# Altium PCB aucma_tranfer V1.0.PcbDoc
Units mil, origin at the board's own origin, x right, y up, seen from the top; angles counter-clockwise.
Board outline 3661.42 x 5380 mil, 2 copper layers (Top Layer, Bottom Layer); 69 components, 0 nets, 222 pads, 82 vias.
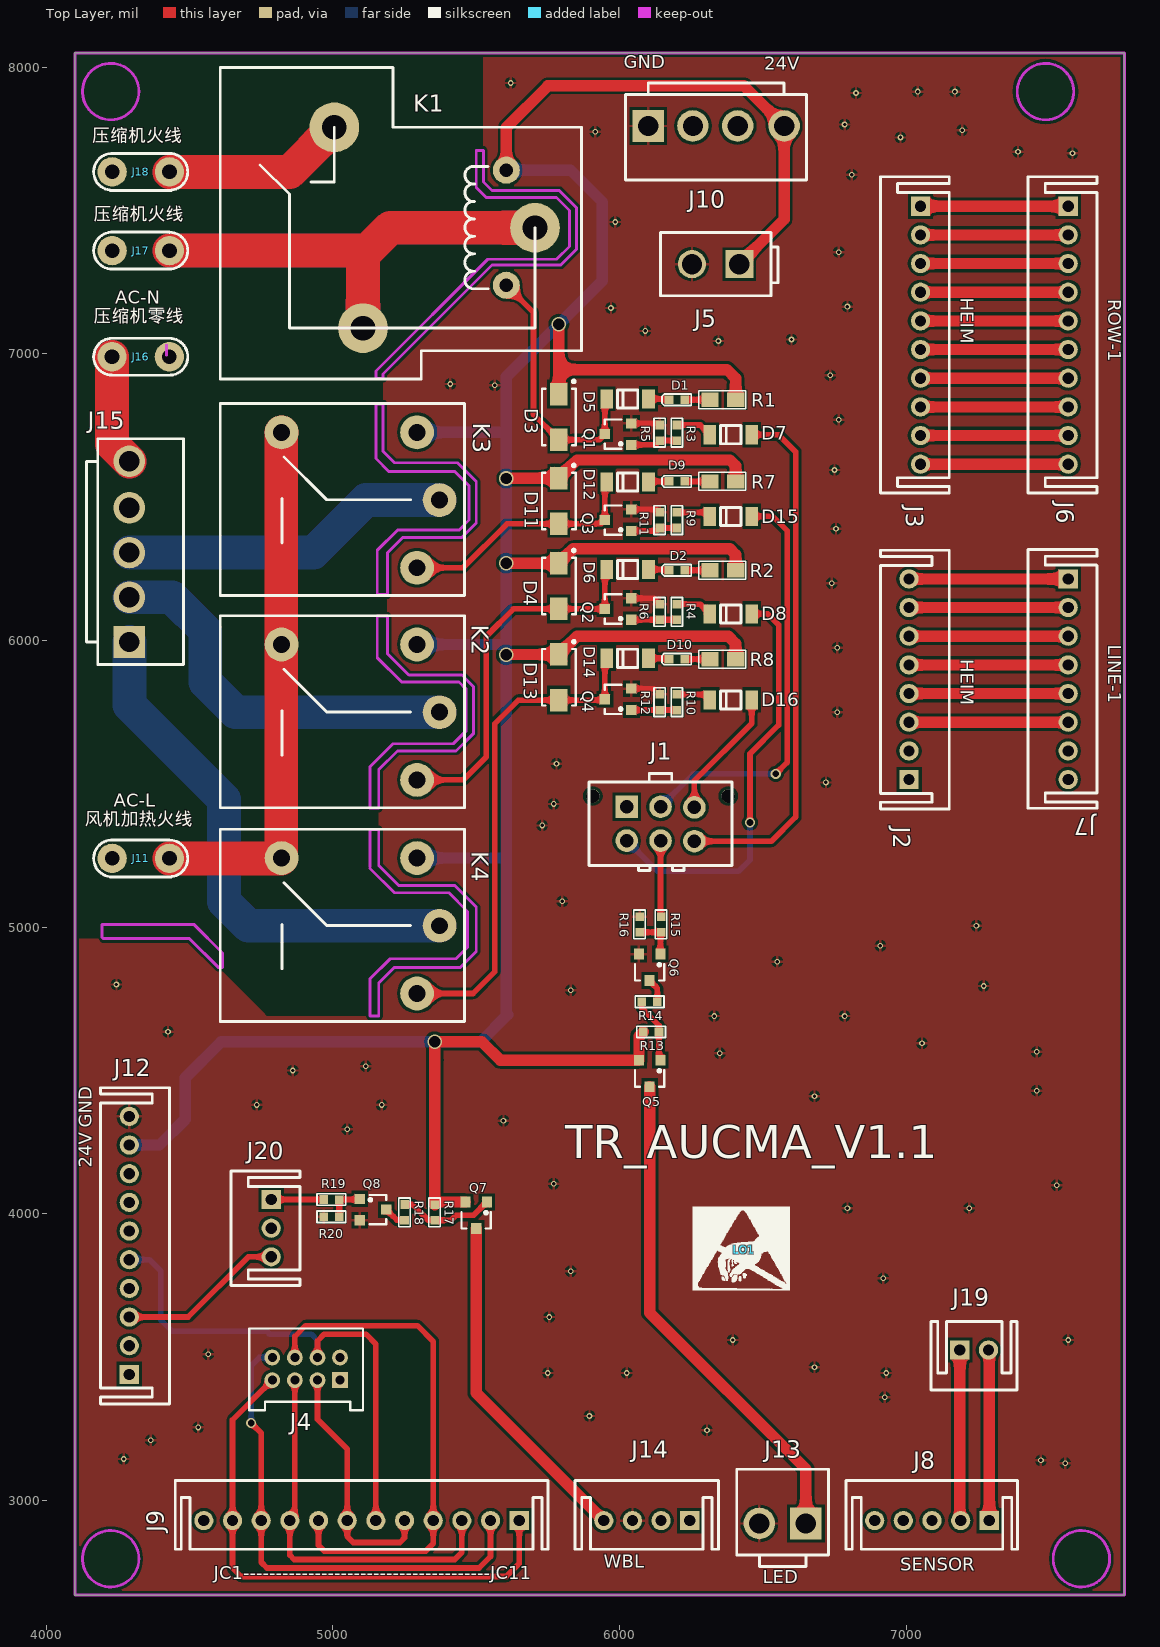
[diagram p0: Top Layer view]
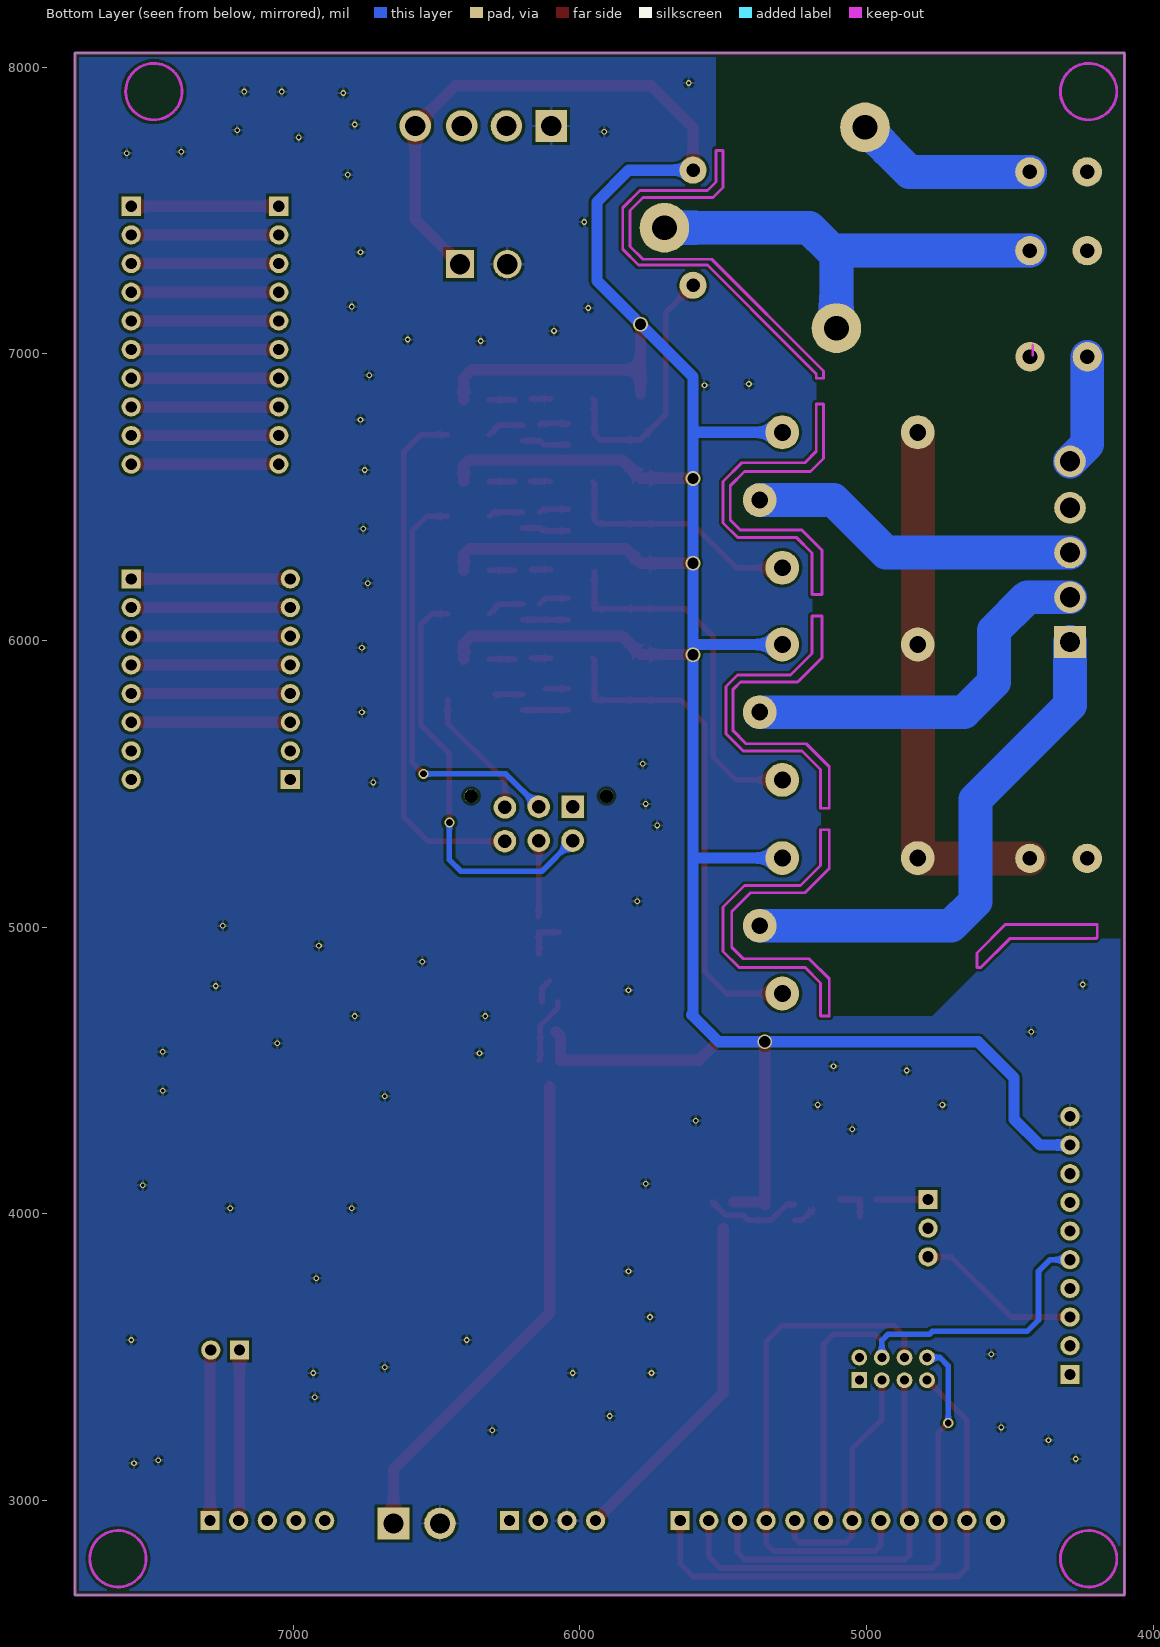
[diagram p1: Bottom Layer view, seen from below]

## Layer stack, top to bottom
Top Solder: solder mask 0.4, Solder Resist, Dk 3.5
Top Layer: signal copper 1.4
Dielectric 1: dielectric 12.6, FR-4, Dk 4.8
Bottom Layer: signal copper 1.4
Bottom Solder: solder mask 0.4, Solder Resist, Dk 3.5

## Board outline
4100,2670 4100,8050 7761.42,8050 7761.42,2670

## Design rules (kind name [scope] priority, off if disabled: settings)
Clearance [All] p1: gap=10
PolygonConnect [All] p1: connectstyle=Relief reliefconductorwidth=10 reliefentries=4 polygonreliefangle="90 Angle" airgapwidth=10
RoutingVias [All] p1: holewidth=28 width=50 viastyle="Through Hole" minholewidth=28 minwidth=50 maxholewidth=28 maxwidth=50
SolderMaskExpansion [All] p1: expansion=4
Width [All] p1: maxlimit=10 minlimit=10 preferedwidth=10
30 further rules are at their usual default settings.

## Components (designator, comment, footprint, x,y, rotation, side; value= is the part's Value field where it differs from the comment)
D1 "蓝色LED" 0603_D 6200,6840 r180 top
D2 "绿色LED" 0603_D 6200,6245 r180 top
D3 "SS34" SMA/DO214AC#1 5788.31,6780 r270 top
D4 "SS34" SMA/DO214AC#1 5788.31,6190 r270 top
D5 "1N4148" LL34_2P 5995,6850 r180 top
D6 "1N4148" LL34_2P 5995,6255 r180 top
D7 "1N4007" LL34_2P 6355,6725 r180 top
D8 "1N4007" LL34_2P 6355,6100 r180 top
D9 "红色LED" 0603_D 6200,6555 r180 top
D10 "黄色LED" 0603_D 6200,5935 r180 top
D11 "SS34" SMA/DO214AC#2 5831.61,6475 r90 top
D12 "1N4148" LL34_2P 5995,6560 r180 top
D13 "SS34" SMA/DO214AC#2 5831.61,5860 r90 top
D14 "1N4148" LL34_2P 5995,5945 r180 top
D15 "1N4007" LL34_2P 6355,6440 r180 top
D16 "1N4007" LL34_2P 6355,5800 r180 top
J1 "DIP-2*3" С5557-2*3A 6025,5420 r0 top
J2 "SIP-8-BLUE" XHB-8A 7010,5515 r90 top
J3 "SIP-10-BLUE" XHB-10A 7050,7515 r270 top
J4 "DIP-2*4" PHB-2*4A 4815,3225 r180 top
J5 "DIP-2*1" 5557-2*1A 6260,7315 r270 top
J6 "SIP-10" XHB-10A 7565,7515 r270 top
J7 "SIP-8" XHB-8A 7565,6215 r270 top
J8 "SIP-5-RED" XHB-5A 7290,2930 r180 top
J9 "SIP-12" XHB-12A 5650,2930 r180 top
J10 "SIP-4" VH3.96-4A 6100,7795 r0 top
J11 "SIP-2" "positioning crimp terminals" 4230,5240 r0 top
J12 "SIP-10-RED" XHB-10A 4290,3440 r90 top
J13 "SIP-2" VH3.96-2A 6650,2920 r180 top
J14 "SIP-4" XHB-4A 6245,2930 r180 top
J15 "SIP-5-RED" VH3.96-5A 4290,6625 r90 top
J16 "SIP-2" "positioning crimp terminals" 4429.6,6990 r180 top
J17 "SIP-2" "positioning crimp terminals" 4230,7360 r0 top
J18 "SIP-2" "positioning crimp terminals" 4230,7635 r0 top
J19 "SIP-2-BLUE" XHB-2A 7195,3525 r0 top
J20 "SIP-3" XHB-3A 4785,4050 r270 top
K1 "Relay-SPST" SLA-24VDC-SL-A 5705,7440 r90 top
K2 "Relay-SPST" HF152FD-1H 5372.36,5750 r180 top
K3 "Relay-SPST" HF152FD-1H 5372.36,6490 r180 top
K4 "Relay-SPST" HF152FD-1H 5372.36,5005 r180 top
LO1 "LOGO" THAND 6435,3875 r0 top
Q1 "BC817-40" SOT-23-3 5995,6720 r90 top
Q2 "BC817-40" SOT-23-3 5995,6110 r90 top
Q3 "BC817-40" SOT-23-3 5995,6420 r90 top
Q4 "BC817-40" SOT-23-3 5995,5795 r90 top
Q5 "AO3401" SOT-23-3 6105,4490 r180 top
Q6 "BC817-40" SOT-23-3 6105,4860 r180 top
Q7 "AO3401" SOT-23-3 5500,3995 r180 top
Q8 "BC817-40" SOT-23-3 5140,4015 r270 top
R1 "4.7KΩ/1%" 0805_R 6315,6840 r0 top
R2 "4.7KΩ/1%" 0805_R 6315,6245 r0 top
R3 "4.7KΩ/1%" 0603_R 6200,6725 r270 top
R4 "4.7KΩ/1%" 0603_R 6200,6100 r270 top
R5 "100KΩ/1%" 0603_R 6140,6725 r270 top
R6 "100KΩ/1%" 0603_R 6140,6100 r270 top
R7 "4.7KΩ/1%" 0805_R 6315,6555 r0 top
R8 "4.7KΩ/1%" 0805_R 6315,5935 r0 top
R9 "4.7KΩ/1%" 0603_R 6200,6420 r270 top
R10 "4.7KΩ/1%" 0603_R 6200,5785 r270 top
R11 "100KΩ/1%" 0603_R 6140,6420 r270 top
R12 "100KΩ/1%" 0603_R 6140,5785 r270 top
R13 "2.2KΩ/1%" 0603_R 6110,4635 r0 top
R14 "4.7KΩ/1%" 0603_R 6105,4740 r180 top
R15 "4.7KΩ/1%" 0603_R 6145,5010 r270 top
R16 "100KΩ/1%" 0603_R 6070,5010 r270 top
R17 "2.2KΩ/1%" 0603_R 5355,4005 r270 top
R18 "4.7KΩ/1%" 0603_R 5250,4005 r90 top
R19 "4.7KΩ/1%" 0603_R 4995,4050 r0 top
R20 "100KΩ/1%" 0603_R 4995,3990 r0 top

## Footprints (in the part's own frame and the unit in brackets; to place one, negate y for a bottom-side part, rotate by r counter-clockwise, add the part's x,y. Pads: shape width x height; smd on the part's side, far side on the other; paste and mask are expansions set on the pad)
0603_D [mil] "贴片发光二极管"
  rect 30x30 smd: 1(-27,0) 2(27.5,-0.06)
  silkscreen extent -50,-20 52,20
0603_R [mil] "电阻"
  rect 30x30 smd: 1(-27,0) 2(27.5,-0.06)
  silkscreen extent -50,-20 50,20
0805_R [mil] "电阻"
  rect 60x50 smd: 1(0.11,0.06) 2(90.11,0.06)
  silkscreen extent -39,-31 126,32
5557-2*1A [mm] "直针-引脚间距4.2mm"
  rect 2.5x2.5 hole 1.8: 1(0.051,4.013)
  round 2.5 hole 1.8: 2(0.051,-0.187)
  silkscreen extent -2.75,-2.99 2.85,7.44
HF152FD-1H [mm] "宏发功率继电器20A,1组常开"
  round 3 hole 1.5: 1(0,0) 2(14,-6) 3(2,6) 4(2,-6)
  silkscreen extent -2.2,-8.55 19.43,8.47
LL34_2P [mil]
  rect 44x66.93 smd: 1(-106,7) 2(40,7)
  silkscreen extent -68,-24 2,38
PHB-2*4A [mm] "直针-引脚间距2.0mm"
  rect 1.4x1.4 hole 0.8: 1(-5.334,-4.953)
  round 1.4 hole 0.8: 2(-3.334,-4.953) 3(-1.334,-4.953) 4(0.666,-4.953) 5(-5.334,-6.953) 6(-3.334,-6.953) 7(-1.334,-6.953) 8(0.666,-6.953)
  silkscreen extent -7.37,-9.53 2.72,-2.29
"positioning crimp terminals" [mm] "6.3mm带定位线路板冷压接插片"
  round 2.6 hole 1.3: 1(0,0) 2(5.08,0)
  silkscreen extent -1.64,-1.64 6.71,1.64
SLA-24VDC-SL-A [mm] "松乐功率继电器[常开A型]"
  round 4.4 hole 2.2: 1(8.9,17.78) 2(-8.9,15.24) 2(0,0)
  round 2.4 hole 1.2: 3(-5.1,2.54) 4(5.1,2.54)
  silkscreen extent -13.4,-4.12 14.2,27.88
SMA/DO214AC#1 [mm] "二极管"
  rect 2x1.55 smd: 1(2.025,0) 2(-2.025,0)
  silkscreen extent -3.27,-1.5 2.5,1.5, body extent -2.5,-1.5 2.5,1.5, height 2.69
SMA/DO214AC#2 [mm] "二极管"
  rect 2x1.55 smd: 1(-1.725,1.1) 2(2.325,1.1)
  silkscreen extent -2.2,-0.4 3.57,2.6, body extent -2.2,-0.4 2.8,2.6, height 2.69
SOT-23-3 [mm]
  rect 0.9x0.95 smd: 1(-0.95,-1.175) 2(0.95,-1.175) 3(0,1.175)
  silkscreen extent -1.3,-0.35 1.3,1.18
THAND [mil]
  silkscreen extent -180,-140 158,150
VH3.96-2A [mm] "直针-引脚间距3.96"
  rect 2.8x2.8 hole 1.8: 1(0,0)
  round 2.8 hole 1.8: 2(4.12,0)
  silkscreen extent -2,-4.8 6.12,3.8
VH3.96-4A [mm] "直针-引脚间距3.96"
  rect 2.8x2.8 hole 1.8: 1(0,0)
  round 2.8 hole 1.8: 2(3.962,0) 3(7.922,0) 4(12.042,0)
  silkscreen extent -2,-4.8 14.04,3.8
VH3.96-5A [mm] "直针-引脚间距3.96"
  rect 2.8x2.8 hole 1.8: 1(-16.002,0)
  round 2.8 hole 1.8: 2(-12.042,0) 3(-8.08,0) 4(-4.12,0) 5(0,0)
  silkscreen extent -18,-4.8 2,3.8
XHB-2A [mm] "直针-引脚间距2.54mm"
  rect 1.7x1.7 hole 1: 1(-0.2,0)
  round 1.7 hole 1: 2(2.34,0)
  silkscreen extent -2.74,-3.56 4.88,2.54
XHB-3A [mm] "直针-引脚间距2.54mm"
  rect 1.7x1.7 hole 1: 1(0,0)
  round 1.7 hole 1: 2(2.54,0) 3(5.08,0)
  silkscreen extent -2.54,-3.56 7.62,2.54
XHB-4A [mm] "直针-引脚间距2.54mm"
  rect 1.7x1.7 hole 1: 1(0,0)
  round 1.7 hole 1: 2(2.54,0) 3(5.08,0) 4(7.62,0)
  silkscreen extent -2.54,-3.56 10.16,2.54
XHB-5A [mm] "直针-引脚间距2.54mm"
  rect 1.7x1.7 hole 1: 1(0,0)
  round 1.7 hole 1: 2(2.54,0) 3(5.08,0) 4(7.62,0) 5(10.16,0)
  silkscreen extent -2.49,-3.56 12.7,2.54
XHB-8A [mm] "直针-引脚间距2.54mm"
  rect 1.7x1.7 hole 1: 1(0,0)
  round 1.7 hole 1: 2(2.54,0) 3(5.08,0) 4(7.62,0) 5(10.16,0) 6(12.7,0) 7(15.24,0) 8(17.78,0)
  silkscreen extent -2.62,-3.56 20.32,2.54
XHB-10A [mm] "直针-引脚间距2.54mm"
  rect 1.7x1.7 hole 1: 1(0,0)
  round 1.7 hole 1: 2(2.54,0) 3(5.08,0) 4(7.62,0) 5(10.16,0) 6(12.7,0) 7(15.24,0) 8(17.78,0) 9(20.32,0) 10(22.86,0)
  silkscreen extent -2.62,-3.56 25.4,2.54
XHB-12A [mm] "直针-引脚间距2.54mm"
  rect 1.7x1.7 hole 1: 1(0,0)
  round 1.7 hole 1: 2(2.54,0) 3(5.08,0) 4(7.62,0) 5(10.16,0) 6(12.7,0) 7(15.24,0) 8(17.78,0) 9(20.32,0) 10(22.86,0) 11(25.4,0) 12(27.94,0)
  silkscreen extent -2.57,-3.56 30.48,2.54
С5557-2*3A [mm] "直针-引脚间距3.0mm"
  rect 2x2 hole 1.2: 1(0,0)
  round 2 hole 1.2: 2(3,0) 3(6,-0.05) 4(0,-3) 5(3,-3) 6(6,-3.05)
  round 1.2 hole 1.2 unplated: ""(-3,0.951) ""(8.998,0.951)
  silkscreen extent -3.33,-5.65 9.33,2.95

## Part data
D1 D2 D9 D10: library part LED, "发光二极管"
D3 D4 D5 D6 D7 D8 D11 D12 D13 D14 D15 D16: library part Diodes, "二极管"
J1: "双排2*3P插座"
J2: library part SIP-8, "单排8P插座"
J3 J12: library part SIP-10, "单排10P插座"
J4: "双排2*4P插座"
J5: "双排2*1P插座"
J6: "单排10P插座"
J7: "单排8P插座"
J8 J15: library part SIP-5, "单排5P插座"
J9: "单排12P插座"
J10 J14: "单排4P插座"
J11 J13 J16 J17 J18: "单排2P插座"
J19: library part SIP-2, "单排2P插座"
J20: "单排3P插座"
K1 K2 K3 K4: "继电器 1组常开(单刀单掷)"
LO1: "百兴Logo"
Q1 Q2 Q3 Q4 Q6 Q8: library part NPN, "三极管"
Q5 Q7: library part MOSFET_P, "P-Channel MOSFET"
R1 R2 R3 R4 R5 R6 R7 R8 R9 R10 R11 R12 R13 R14 R15 R16 R17 R18 R19 R20: library part RES2, "电阻"

## Via types
v1: diameter 19.68, hole 11.81, Top Layer to Bottom Layer, tented both sides, 74 vias
v2: diameter 51.18, hole 39.37, Top Layer to Bottom Layer, tented both sides, 5 vias
v3: diameter 35.43, hole 23.62, Top Layer to Bottom Layer, tented both sides, 3 vias

## Nets (pads, with @x,y where several pads share a name; then routed paths per layer and width w, separated by ;. In a path a pad name is that pad's centre, name@x,y a point inside that pad or via, vN(x,y) a via of type N, cw(c..) or ccw(c..) an arc to the next point about the centre after c; other vN are vias at no path point)
pads on no net: D1.1 D1.2 D2.1 D2.2 D3.1 D3.2 D4.1 D4.2 D5.1 D5.2 D6.1 D6.2 D7.1 D7.2 D8.1 D8.2 D9.1 D9.2 D10.1 D10.2 D11.1 D11.2 D12.1 D12.2 D13.1 D13.2 D14.1 D14.2 D15.1 D15.2 D16.1 D16.2 J1. J1.1 J1.2 J1.3 J1.4 J1.5 J1.6 J2.1 J2.2 J2.3 J2.4 J2.5 J2.6 J2.7 J2.8 J3.1 J3.2 J3.3 J3.4 J3.5 J3.6 J3.7 J3.8 J3.9 J3.10 J4.1 J4.2 J4.3 J4.4 J4.5 J4.6 J4.7 J4.8 J5.1 J5.2 J6.1 J6.2 J6.3 J6.4 J6.5 J6.6 J6.7 J6.8 J6.9 J6.10 J7.1 J7.2 J7.3 J7.4 J7.5 J7.6 J7.7 J7.8 J8.1 J8.2 J8.3 J8.4 J8.5 J9.1 J9.2 J9.3 J9.4 J9.5 J9.6 J9.7 J9.8 J9.9 J9.10 J9.11 J9.12 J10.1 J10.2 J10.3 J10.4 J11.1 J11.2 J12.1 J12.2 J12.3 J12.4 J12.5 J12.6 J12.7 J12.8 J12.9 J12.10 J13.1 J13.2 J14.1 J14.2 J14.3 J14.4 J15.1 J15.2 J15.3 J15.4 J15.5 J16.1 J16.2 J17.1 J17.2 J18.1 J18.2 J19.1 J19.2 J20.1 J20.2 J20.3 K1.1 K1.2 K1.3 K1.4 K2.1 K2.2 K2.3 K2.4 K3.1 K3.2 K3.3 K3.4 K4.1 K4.2 K4.3 K4.4 Q1.1 Q1.2 Q1.3 Q2.1 Q2.2 Q2.3 Q3.1 Q3.2 Q3.3 Q4.1 Q4.2 Q4.3 Q5.1 Q5.2 Q5.3 Q6.1 Q6.2 Q6.3 Q7.1 Q7.2 Q7.3 Q8.1 Q8.2 Q8.3 R1.1 R1.2 R2.1 R2.2 R3.1 R3.2 R4.1 R4.2 R5.1 R5.2 R6.1 R6.2 R7.1 R7.2 R8.1 R8.2 R9.1 R9.2 R10.1 R10.2 R11.1 R11.2 R12.1 R12.2 R13.1 R13.2 R14.1 R14.2 R15.1 R15.2 R16.1 R16.2 R17.1 R17.2 R18.1 R18.2 R19.1 R19.2 R20.1 R20.2
copper on no net: | length 60580.9
  Top Layer w10: 6041.26,6682.6 6051.16,6692.5 ; 6169.56,6843 6172.5,6840.06
  Top Layer w11.81: 6041.26,6757.4 6051.66,6747
  Top Layer w19.68: 4290,3640 4495,3640 4705,3850 4785,3850 ; v3(4715,3270) 4750,3235 4750,2930 4750,2784.68 4770,2764.68 5510,2764.68 5550,2804.68 5550,2930 ; 4785,4050 4968,4050 ; 4788.78,3420 4650,3281.22 4650,2765 4680,2735 5605,2735 5650,2780 5650,2930 ; 4867.52,3420 4867.52,2947.52 4850,2930 4850,2809.37 4865,2794.37 5425,2794.37 5450,2819.37 5450,2930 ; 4867.52,3498.74 4867.52,3572.52 4905,3610 5295,3610 5350,3555 5350,2930 5350,2850 5324.06,2824.05 4970,2824.05 4950,2844.05 4950,2930 ; 4946.26,3420 4946.26,3283.74 5050,3180 5050,2930 5050,2875 5071.26,2853.74 5233.74,2853.74 5250,2870 5250,2930 ; 4946.26,3498.74 4946.26,3556.57 4970,3580.32 5115,3580.32 5150,3545.32 5150,2930 ; 5022.5,3989.94 5022.5,4049.94 5091.27,4049.94 5093.74,4052.4 ; 5186.26,4015 5223.26,3978 5250,3978 ; 5250.06,4032.5 5277.5,4032.5 5332.5,3977.5 5354.94,3977.5 5412.5,3977.5 5430,3995 5491.14,3995 5537.4,4041.26 ; 5293.62,4768.78 5488.78,4768.78 5565,4845 5565,5710 5647.09,5792.09 5788.31,5792.09 5945.83,5792.09 5948.74,5795 5948.74,5931.74 5955,5938 ; 5293.62,5513.78 5455,5513.78 5535,5593.78 5535,6015 5630.28,6110.28 5788.31,6110.28 5948.46,6110.28 5948.74,6110 5948.74,6241.74 ; 5293.62,6253.78 5453.78,6253.78 5607.09,6407.09 5788.31,6407.09 5935.83,6407.09 5948.74,6420 5948.74,6546.74 5955,6553 ; 5605,7239.21 5700,7144.21 5700,6788.58 5788.31,6700.28 5929.02,6700.28 5948.74,6720 5948.74,6836.74 5955,6843 ; 6041.26,5757.6 6199.84,5757.6 ; 6041.26,5832.4 6119.6,5832.4 ; 6041.26,6072.6 6199.84,6072.6 ; 6041.26,6147.4 6119.6,6147.4 6140,6127 ; 6041.26,6382.6 6130.03,6382.6 6139.94,6392.5 6199.94,6392.5 ; 6041.26,6457.4 6129.6,6457.4 6140,6447 ; 6041.26,6682.6 6125.03,6682.6 6139.94,6697.5 6199.94,6697.5 ; 6041.26,6757.4 6134.6,6757.4 6140,6752 ; 6069.94,4982.5 6144.94,4982.5 6142.4,4979.97 6142.4,4906.26 ; 6077.5,4740.06 6077.5,4717.5 6137.5,4657.5 6137.5,4634.94 6137.5,4541.16 6142.4,4536.26 ; 6101,5938 6169.56,5938 ; 6101,6248 6169.56,6248 ; 6101,6843 6169.56,6843 ; 6103.06,6555.06 6172.5,6555.06 ; 6105,4813.74 6132,4786.74 6132,4740 ; 6143.11,5301.89 6143.11,5038.89 6145,5037 ; 6200,5812 6296,5812 ; 6200,6127 6281,6127 6315,6093 ; 6200,6447 6301,6447 6315,6433 ; 6200,6752 6281,6752 6315,6718 ; 6227,5935 6315.06,5935 ; 6227,6245 6315.06,6245 ; 6227,6555 6315.06,6555 6315.11,6555.06 ; 6227,6840 6315.06,6840 6315.11,6840.06 ; 6261.21,5299.92 6529.92,5299.92 6614.37,5384.37 6614.37,6658.63 6555,6718 6461,6718 ; 6261.21,5418.03 6261.21,5511.21 6461,5711 6461,5793 ; v3(6455,5365) 6455,5605 6555,5705 6555,6055 6517,6093 6461,6093 ; 6461,6433 6535,6433 6584.69,6383.31 6584.69,5574.69 v3(6545,5535)
  Top Layer w39.37: 5356.26,4536.26 5355,4535 ; 5462.6,4041.26 5364.26,4041.26 5355,4032 5355,4535 ; 5500,3948.74 5500,3375 5945,2930 ; v2(5605,5950) 5606.54,5951.54 5788.31,5951.54 5851.77,6015 6380,6015 6405.11,5989.89 6405.11,5935.06 ; v2(5605,6270) 5605.28,6269.72 5788.31,6269.72 5838.58,6320 6385,6320 6405.11,6299.89 6405.11,6245.06 ; v2(5605,6565) 5606.54,6566.54 5788.31,6566.54 5851.77,6630 6385,6630 6405.11,6609.89 6405.11,6555.06 ; 5605,7640.79 5605,7790 5750,7935 6434.1,7935 6574.1,7795 6574.1,7469.1 6418,7313 ; 5788.31,6859.72 5788.31,6945 ; v2(5788.31,7103.31) 5788.31,6945 ; 6083,4635 6067.6,4619.6 6067.6,4536.26 5583.74,4536.26 5520,4600 v2(5355,4600) 5355,4535 ; 6105,4443.74 6105,3655 6650,3110 6650,2920 ; 6405.11,6840.06 6405.11,6914.89 6375,6945 5788.31,6945 ; 7010,5715 7565,5715 ; 7010,5815 7565,5815 ; 7010,5915 7565,5915 ; 7010,6015 7565,6015 ; 7010,6115 7565,6115 ; 7010,6215 7565,6215 ; 7050,6615 7565,6615 ; 7050,6715 7565,6715 ; 7050,6815 7565,6815 ; 7050,6915 7565,6915 ; 7050,7015 7565,7015 ; 7050,7115 7565,7115 ; 7050,7215 7565,7215 ; 7050,7315 7565,7315 ; 7050,7415 7565,7415 ; 7050,7515 7565,7515 ; 7187.13,3525 7187.13,2932.87 7190,2930 ; 7287.13,3525 7290,3522.13 7290,2930
  Top Layer w118.11: 4229.6,6990 4229.6,6685.4 4290,6625 ; 4430,5240 4819.96,5240 4819.96,6725 4821.18,6726.22 ; 4430,7360 5120,7360 ; 4430,7635 4849.61,7635 5005,7790.39 ; 5105,7089.61 5105,7345 5120,7360 ; 5705,7440 5200,7440 5120,7360
  Bottom Layer w19.68: 4290,3840 4360,3840 4400,3800 4400,3630 4440,3590 4770,3590 4780,3580 4925,3580 4946.26,3558.74 4946.26,3498.74 ; v3(4715,3270) 4715,3470 4743.74,3498.74 4788.78,3498.74 ; 4850,2920 4850,2930 ; 4865,3417.48 4867.52,3420 ; 6025,5301.89 6131.89,5195 6415,5195 6455,5235 v3(6455,5365) ; 6143.11,5420 6258.11,5535 v3(6545,5535)
  Bottom Layer w39.37: 4290,4240 4395,4240 4485,4330 4485,4475 4610,4600 v2(5355,4600) 5515,4600 5610,4695 5605,4700 5605,5245 ; 5293.62,5241.22 5601.22,5241.22 5605,5245 ; 5293.62,5986.22 5603.78,5986.22 ; 5293.62,6726.22 5601.22,6726.22 ; 5605,7640.79 5829.21,7640.79 5940,7530 5940,7255 v2(5788.31,7103.31) 5605,6920 v2(5605,6565) v2(5605,6270) v2(5605,5950) 5605,5245
  Bottom Layer w118.11: 4229.6,6990 4229.6,6685.4 4290,6625 ; 4290,5995 4290,5775 4620,5445 4620,5090 4705,5005 5372.36,5005 ; 4290,6150.9 4439.1,6150.9 4555,6035 4555,5855 4660,5750 5372.36,5750 ; 4290,6306.9 4931.9,6306.9 5115,6490 5372.36,6490 ; 4430,7360 5120,7360 ; 4430,7635 4849.61,7635 5005,7790.39 ; 5105,7089.61 5105,7345 5120,7360 ; 5705,7440 5200,7440 5120,7360
  other v1: 7555,3130 7470,3140 4270,3145 4365,3210 6305,3245 4530,3255 5895,3295 6925,3360 5750,3445 6025,3445 6930,3445 6680,3465 4565,3510 6395,3560 7565,3560 5755,3640 6920,3775 5830,3800 6795,4020 7220,4020 7525,4100 5770,4105 5050,4295 5595,4325 4735,4380 5170,4380 6680,4410 7455,4430 4860,4500 5115,4515 6350,4560 7455,4565 7055,4595 4425,4635 6330,4690 6785,4690 5830,4780 7270,4795 4245,4800 6550,4880 6910,4935 7245,5005 5800,5090 5730,5355 5770,5430 6720,5505 5780,5570 6760,5750 6760,5975 6740,6200 6755,6390 6750,6595 6765,6770 5565,6890 5410,6895 6735,6925 6345,7045 6600,7050 6090,7080 5970,7160 6795,7165 6765,7355 5985,7460 6810,7625 7580,7700 7390,7705 6980,7755 5915,7775 7195,7780 6785,7800 6825,7910 7040,7915 7170,7915 5620,7945

## Polygon pours and split planes (outlines as drawn)
no net on Top Layer "GND" (solid, remove dead copper, pour order 4): 5525,7710 5525,8050 7761.42,8050 7761.42,2670 4100,2670 4100,4960 4500,4960 4600,4860 4755,4705 4770,4690 5130,4690 5160,4690 5160,4805 5215,4860 5445,4860 5500,4915 5500,5070 5425,5145 5230,5145 5160,5215 5160,5550 5225,5615 5430,5615 5490,5675 5490,5840 5450,5880 5265,5880 5190,5955 5190,6305 5245,6360 5450,6360 5500,6410 5500,6555 5435,6620 5215,6620 5175,6660 5175,6930 5555,7310 5795,7310 5850,7365 5850,7510 5790,7570 5555,7570 5525,7600 5525,8050
no net on Bottom Layer "GND" (solid, remove dead copper, pour order 3): 5525,7710 5525,8050 7761.42,8050 7761.42,2670 4100,2670 4100,4960 4500,4960 4600,4860 4755,4705 4770,4690 5130,4690 5160,4690 5160,4805 5215,4860 5445,4860 5500,4915 5500,5070 5425,5145 5230,5145 5160,5215 5160,5550 5225,5615 5430,5615 5490,5675 5490,5840 5450,5880 5265,5880 5190,5955 5190,6305 5245,6360 5450,6360 5500,6410 5500,6555 5435,6620 5215,6620 5175,6660 5175,6930 5555,7310 5795,7310 5850,7365 5850,7510 5790,7570 5555,7570 5525,7600 5525,8050

## Keep-outs
Keep-Out Layer:
  circle w10: c7485.83,7915 r98.43
  circle w10: c7611.02,2796.89 r98.43
  circle w10: c4225,2796.89 r98.43
  circle w10: c4225,7915 r98.43
  lines w10: 4420,6995 4420,7030 ; 5130,5205 5215,5120 5405,5120 5470,5055 5470,4930 5430,4890 5200,4890 5130,4820 5130,4690 5160,4690 5160,4805 5215,4860 5445,4860 5500,4915 5500,5070 5425,5145 5230,5145 5160,5215 5160,5340 5130,5340 5130,5210 ; 5185,6160 5155,6160 5155,6315 5225,6385 5440,6385 5475,6420 5475,6540 5425,6590 5195,6590 5150,6635 5150,6825 5175,6825 5175,6660 5215,6620 5435,6620 5500,6555 5500,6410 5450,6360 5245,6360 5190,6305 5190,6160 ; 5575,7330 5780,7330 5825,7375 5825,7485 5825,7500 5780,7545 5580,7545 5535,7545 5500,7580 5500,7710 5525,7710 5525,7600 5555,7570 5770,7570 5790,7570 5850,7510 5850,7365 5795,7310 5555,7310 5250,7005 5175,6930 5175,6915 5150,6915 5150,6940 5540,7330 5625,7330 ; 4100,2670 4100,8050 7761.42,8050 7761.42,2670 4100,2670 ; 4195,4965 4200,4960 4375,4960 4500,4960 4600,4860 4615,4860 4615,4885 4615,4910 4515,5010 4195,5010 4195,4965 ; 5130,5415 5160,5415 5160,5550 5225,5615 5430,5615 5490,5675 5490,5840 5450,5880 5265,5880 5190,5955 5190,6085 5155,6085 5155,5940 5240,5855 5440,5855 5465,5830 5465,5685 5420,5640 5210,5640 5130,5560 5130,5520 5130,5415

## Silkscreen, mask and mechanical layers (free items; w line width, h text height)
Top Overlay:
  text "GND" at 6015,7980 h78.74
  text "24V" at 6505,7975 h78.74
  text "压缩机火线" at 4160,7725 h78.74
  text "压缩机火线" at 4165,7450 h78.74
  text "HEIM" at 7175,7195 h78.74 r270
  text "ROW-1" at 7690,7190 h78.74 r270
  text "AC-N" at 4240,7160 h78.74
  text "压缩机零线" at 4165,7095 h78.74
  text "LINE-1" at 7690,5985 h78.74 r270
  text "HEIM" at 7175,5935 h78.74 r270
  text "AC-L" at 4235,5405 h78.74
  text "风机加热火线" at 4135,5340 h78.74
  text "GND" at 4175,4300 h78.74 r90
  text "24V" at 4175,4160 h78.74 r90
  text "TR_AUCMA_V1.1" at 5810,4155 h196.85
  text "WBL" at 5945,2750 h78.74
  text "SENSOR" at 6980,2740 h78.74
  text "JC1--------------------------------------JC11" at 4585,2710 h78.74
  text "LED" at 6500,2695 h78.74